# EAGLE board Theia (EAGLE 7.7.0)
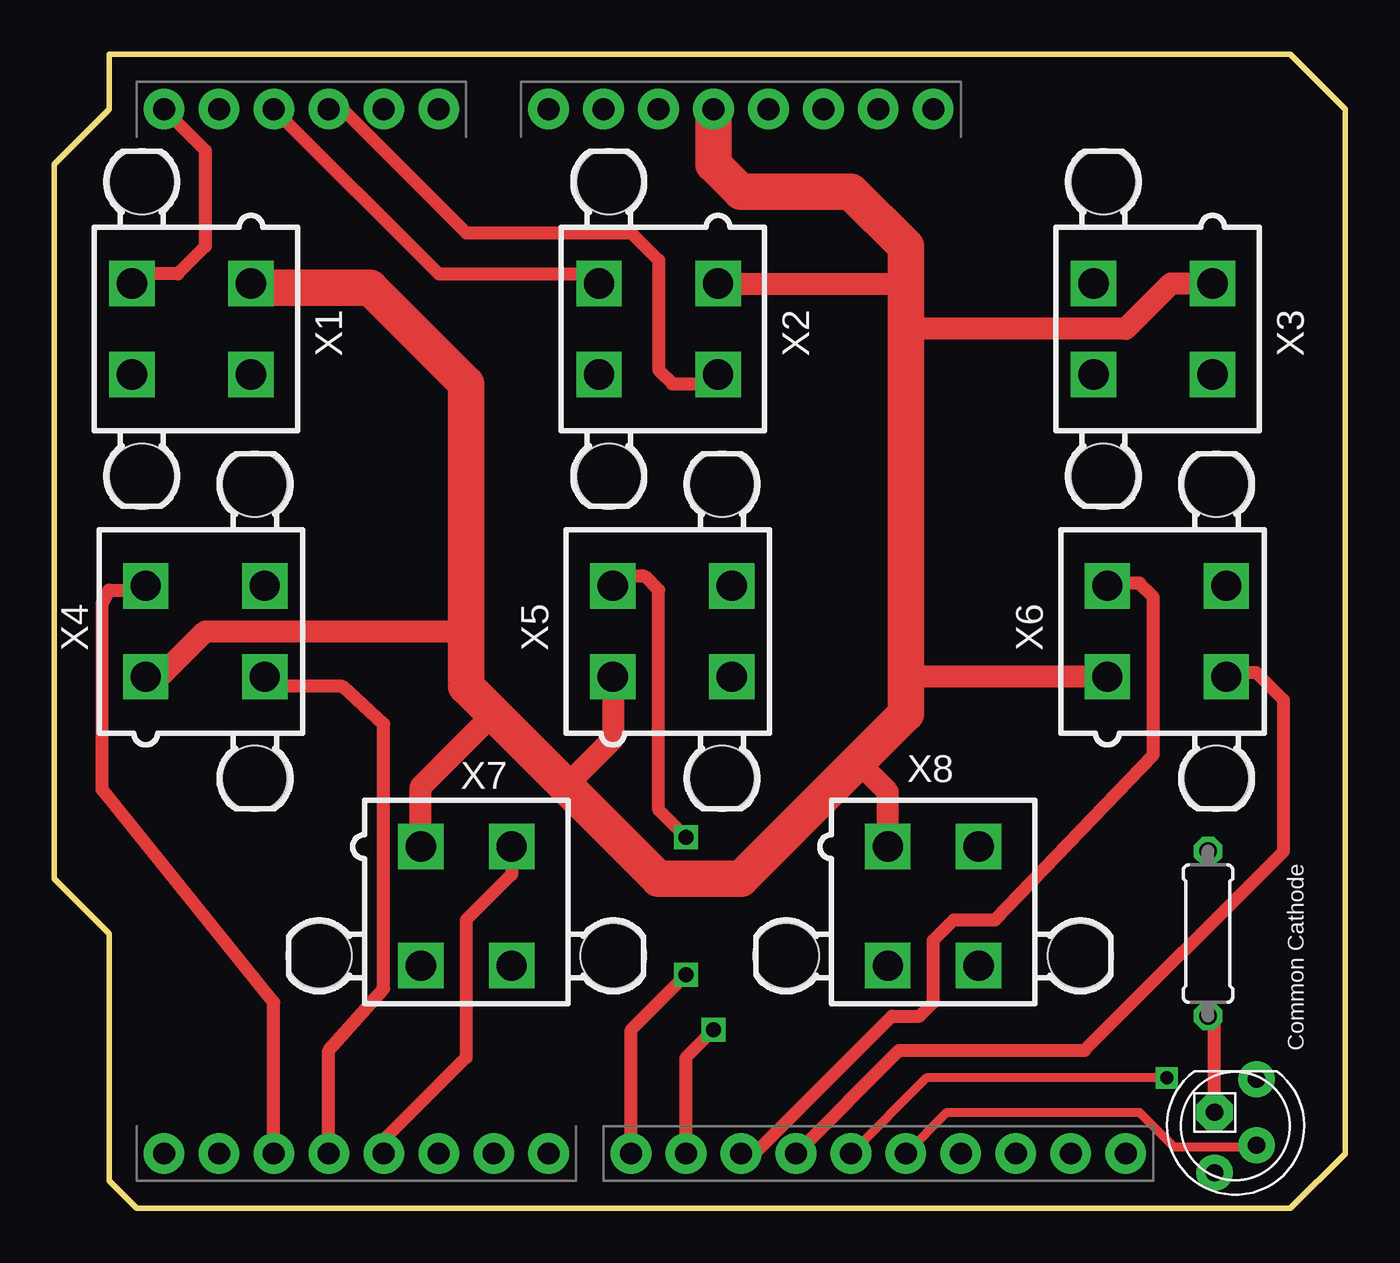
[diagram p0: board, top side]
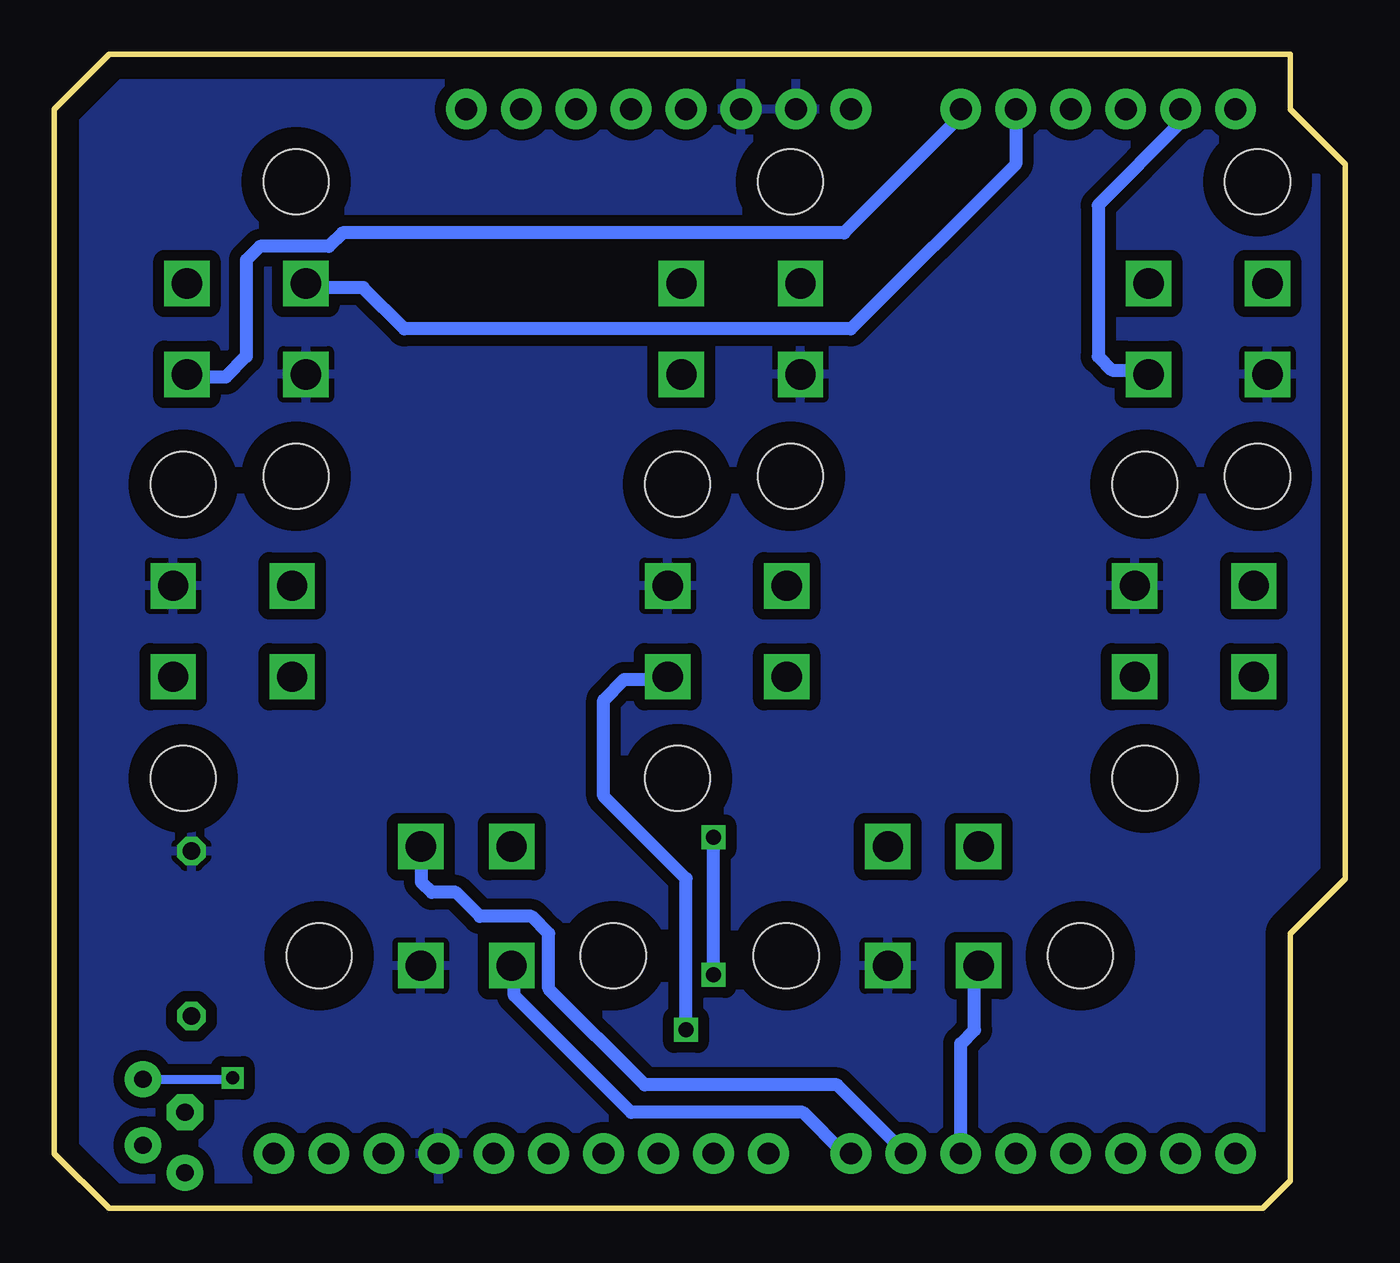
[diagram p1: board, bottom side, seen from below]

Size 59.69 x 53.34 mm. Coordinates in mm from the lower left corner, seen from the top.
Outline: 0,48.26 0,15.24 2.54,12.7 2.54,1.27 3.81,0 57.15,0 59.69,2.54 59.69,50.8 57.15,53.34 2.54,53.34 2.54,50.8 0,48.26
Copper layers (1*16): Top 0.035mm / dielectric 1.5mm / Bottom 0.035mm
Design rules "default": minimum track width 10mil, minimum drill 24mil, track to track 8mil, track to pad 8mil, pad to pad 8mil, via to via 8mil, smd to smd 8mil, copper to edge 40mil, drill to drill 8mil, minimum pad ring 10mil, minimum via ring 8mil, stop-mask expansion 4mil, vias tented up to drill 0mil, thermal gap 10mil
Net classes: 0 default: clearance 0.508 mm

## Footprints (pad centres in the part's own frame; a part is rotated, then mirrored left to right if it is on the bottom)
0207/7 = drill 0.813 octagon: 1 -3.81,0; 2 3.81,0
UNO_R3_SHIELD = drill 1.016 pad 1.88: 3.3V 50.8,26.67; 5V 50.8,29.21; A0 50.8,41.91; A1 50.8,44.45; A2 50.8,46.99; A3 50.8,49.53; A4 50.8,52.07; A5 50.8,54.61; AREF 2.54,15.24; D2 2.54,49.53; D3 2.54,46.99; D4 2.54,44.45; D5 2.54,41.91; D6 2.54,39.37; D7 2.54,36.83; D8 2.54,33.02; D9 2.54,30.48; D10 2.54,27.94; D11 2.54,25.4; D12 2.54,22.86; D13 2.54,20.32; GND@0 50.8,31.75; GND@1 50.8,34.29; GND@2 2.54,17.78; IOREF 50.8,21.59; NC 50.8,19.05; RES 50.8,24.13; RX 2.54,54.61; SCL 2.54,10.16; SDA 2.54,12.7; TX 2.54,52.07; VIN 50.8,36.83
LED5MMRGB = drill 0.8 pad 1.676: 1 -2.159,0.968; 3 0.889,0.968; 4 2.159,-0.968 | drill 0.8 pad 1.676 octagon: 2 -0.635,-0.968
5566-4 = drill 1.4 square: 1 2.1,-2.75; 2 -2.1,-2.75; 3 2.1,2.75; 4 -2.1,2.75 | hole 3: 6.8,2.29; -6.8,2.29

## Placement (x,y rotation side)
R1  1k  [0207/7]  53.34,12.7 90 top
U1  ARDUINO_R3_SHIELD  [UNO_R3_SHIELD]  59.69,0 90 top
U$1  RGBLED_CA  [LED5MMRGB]  54.61,3.81 270 top
X1  5566-4  [5566-4]  6.35,40.64 90 top
X2  5566-4  [5566-4]  27.94,40.64 90 top
X3  5566-4  [5566-4]  50.8,40.64 90 top
X4  5566-4  [5566-4]  6.99,26.67 270 top
X5  5566-4  [5566-4]  28.57,26.67 270 top
X6  5566-4  [5566-4]  51.44,26.67 270 top
X7  5566-4  [5566-4]  19.05,13.97 180 top
X8  5566-4  [5566-4]  40.64,13.97 180 top

## Library data of the parts
R1 U$1 = adafruit
U1 = Nathans-Arduinos
X1-X8 = con-molex; OC_FARNELL: unknown; OC_NEWARK: unknown

## Nets
5V: U1.5V X1.1 X2.1 X3.1 X4.1 X5.1 X6.1 X7.1 X8.1
E1: U1.A5 X1.3
E2: U1.A3 X2.3
E3: U1.A1 X3.3
E4: U1.D3 X4.3
E5: U1.D9 X5.3
E6: U1.D11 X6.3
E7: U1.D5 X7.3
E8: U1.D7 X8.3
GND: R1.2 U1.GND@0 U1.GND@1 U1.GND@2 X1.4 X2.4 X3.4 X4.4 X5.4 X6.4 X7.4 X8.4
GREEN: U1.D13 U$1.3
N$8: R1.1 U$1.2
RED: U1.D12 U$1.1
T1: U1.A4 X1.2
T2: U1.A2 X2.2
T3: U1.A0 X3.2
T4: U1.D2 X4.2
T5: U1.D8 X5.2
T6: U1.D10 X6.2
T7: U1.D4 X7.2
T8: U1.D6 X8.2

## Tracks (layer width: path | path; a pad name or v marks a point on that pad's centre or on a via)
5V
  Top 1.016: 39.37,44.45 39.37,42.55 | 39.37,42.55 39.37,40.64 | 39.37,40.64 39.37,24.13 | 39.37,24.13 39.37,22.86 37.15,20.64 | 37.15,20.64 31.75,15.24 | 27.94,15.24 23.65,19.53 | 23.65,19.53 20.32,22.86 | 20.32,22.86 19.05,24.13 19.05,24.45 19.05,26.99 | 19.05,26.99 19.05,38.1 | 14.61,42.55 9.29,42.55 X1.1 | X4.1 4.88,24.57 6.99,26.67 18.73,26.67 19.05,26.99 | X7.1 16.95,19.49 20.32,22.86 | X5.1 25.82,21.7 23.65,19.53 | X8.1 38.54,19.25 37.15,20.64 | X6.1 39.81,24.57 39.37,24.13 | X3.1 51.63,42.74 49.53,40.64 39.37,40.64 | X2.1 39.17,42.74 39.37,42.55
  Top 1.676: U1.5V 30.48,48.26 31.75,46.99 36.83,46.99 39.37,44.45 39.37,40.64 39.37,22.86 31.75,15.24 27.94,15.24 19.05,24.13 | 9.21,42.55 14.61,42.55 19.05,38.1 19.05,24.45
E1
  Top 0.61: U1.A5 6.99,48.9 6.99,44.45 5.71,43.18 4.04,43.18 X1.3
E2
  Top 0.61: U1.A3 17.78,43.18 24.75,43.18 X2.3
E3
  Bottom 0.61: U1.A1 15.24,48.26 22.86,40.64 43.5,40.64 45.4,42.55 47.85,42.55 X3.3
E4
  Top 0.61: U1.D3 12.7,7.3 15.24,10.16 15.24,22.38 13.34,24.13 10.18,24.13 X4.3
E5  (via drill 0.7)
  Top 0.61: U1.D9 29.21,6.99 v30.48,8.26
  Bottom 0.61: v30.48,8.26 30.48,15.24 34.29,19.05 34.29,23.5 33.34,24.45 31.45,24.45 X5.3
E6
  Top 0.61: U1.D11 39.05,7.3 47.62,7.3 56.83,16.51 56.83,23.5 55.56,24.77 54.38,24.77 X6.3
E7
  Bottom 0.61: U1.D5 17.78,7.62 17.14,8.26 17.14,11.03 X7.3
E8
  Bottom 0.61: U1.D7 23.18,2.54 25.08,4.45 33.02,4.45 38.42,9.84 38.42,11.1 X8.3 38.43,11.11
GND
  pour Bottom: 0,48.26 0,15.24 2.54,12.7 2.54,1.27 3.81,0 57.15,0 59.69,2.54 59.69,50.8 57.15,53.34 2.54,53.34 2.54,50.8
GREEN
  Top 0.406: U1.D13 41.27,4.45 50.16,4.45 51.75,2.86 55.52,2.86 U$1.3
N$8
  Top 0.61: U$1.2 53.64,8.59 R1.1
RED  (via drill 0.6)
  Top 0.406: v51.44,6.03 40.32,6.03 U1.D12
  Bottom 0.406: U$1.1 51.5,5.97 v51.44,6.03
T1
  Bottom 0.61: U1.A4 7.62,50.16 11.43,46.35 11.43,39.37 10.79,38.73 9.29,38.73 X1.2
T2
  Top 0.61: U1.A2 13.34,50.8 19.05,45.09 26.67,45.09 27.94,43.81 27.94,38.73 28.57,38.1 30.25,38.1 X2.2
T3
  Bottom 0.61: U1.A0 17.78,50.48 23.18,45.09 46.35,45.09 46.99,44.45 50.16,44.45 50.8,43.81 50.8,39.37 51.75,38.42 53.43,38.42 X3.2
T4
  Top 0.61: U1.D2 10.16,9.53 2.22,19.37 2.22,27.94 2.54,28.57 4.04,28.57 X4.2
T5  (via drill 0.7)
  Top 0.61: U1.D8 26.67,8.26 v29.21,10.79 | v29.21,17.14 27.94,18.41 27.94,28.57 27.3,29.21 26.27,29.21 X5.2
  Bottom 0.61: v29.21,10.79 v29.21,17.14
T6
  Top 0.61: U1.D10 32.38,2.54 38.73,8.89 40.01,8.89 40.64,9.53 40.64,12.38 41.59,13.34 43.5,13.34 50.8,20.95 50.8,28.26 50.16,28.89 48.81,28.89 X6.2
T7
  Top 0.61: X7.2 21.15,15.44 19.05,13.34 19.05,6.99 15.24,3.17 U1.D4
T8
  Bottom 0.61: U1.D6 23.5,5.71 32.38,5.71 36.83,10.16 36.83,12.7 37.62,13.49 40.01,13.49 41.12,14.61 42.23,14.61 42.7,15.08 42.7,16.68 X8.2

## Text on the board
tNames: Common Cathode